# Altium PCB PhonePresent-oldversion.PcbDoc
Units mm, origin at the board's own origin, x right, y up, seen from the top; angles counter-clockwise.
Board outline 152.4 x 101.6 mm, 2 copper layers (Top Layer, Bottom Layer); 9 components, 6 nets, 19 pads, 1 vias.
Unrouted connection lines stored in the file: 1.
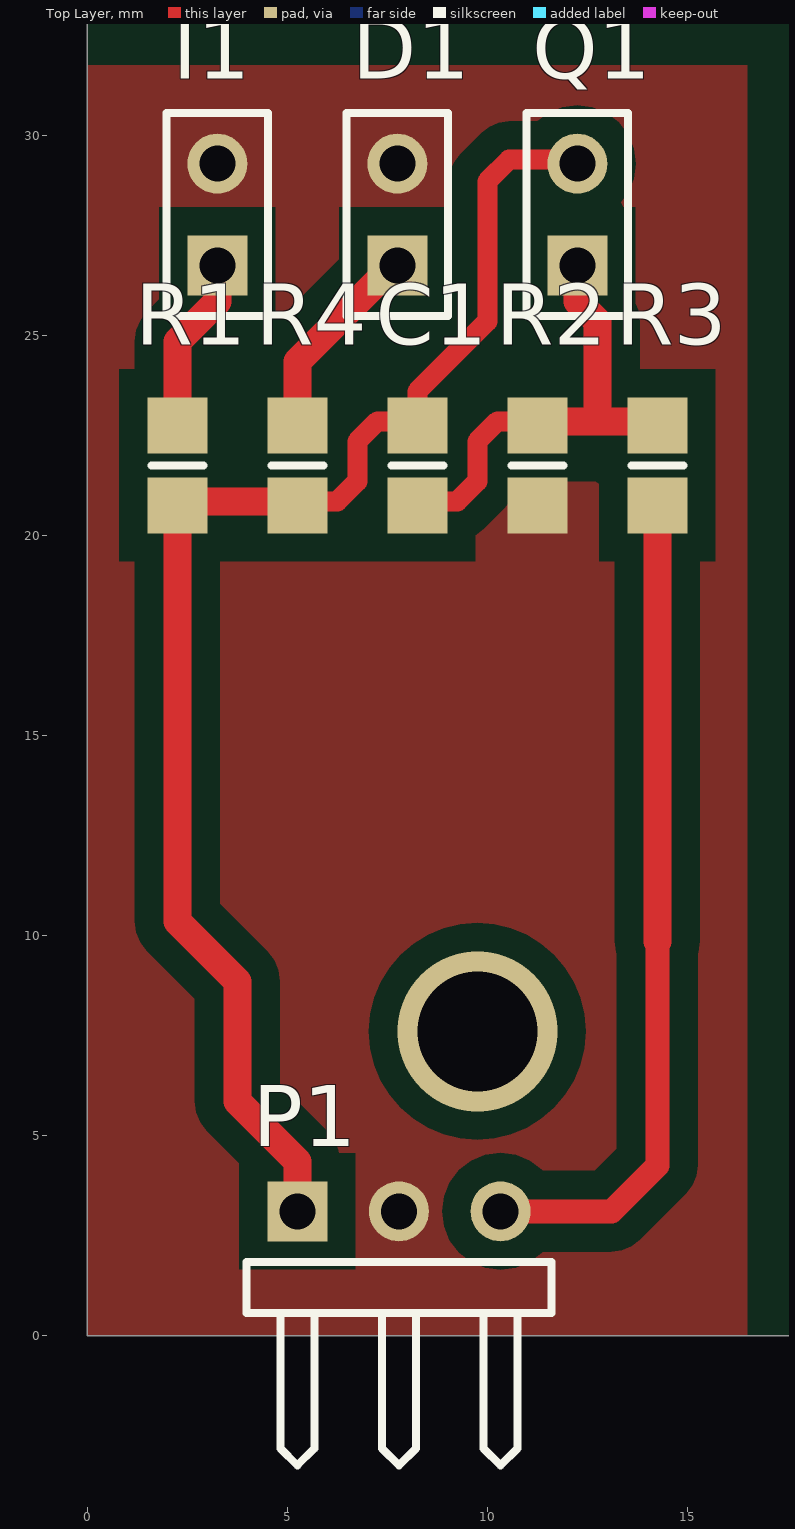
[diagram p0: Top Layer view]
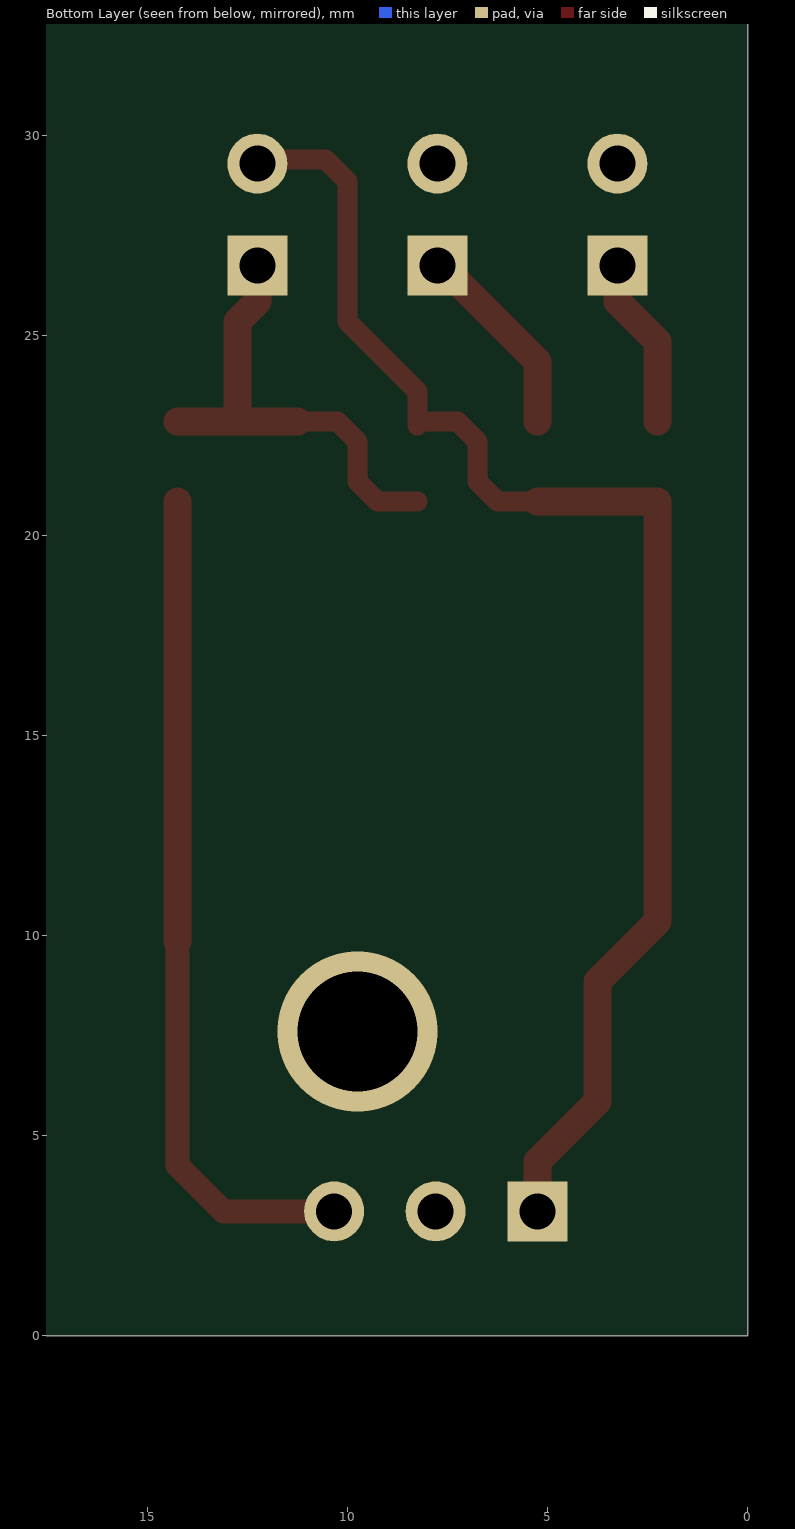
[diagram p1: Bottom Layer view, seen from below]

## Layer stack, top to bottom
Top Solder: solder mask 0.0102, Solder Resist, Dk 3.5
Top Layer: signal copper 0.0356
Dielectric 1: dielectric 0.32, FR-4, Dk 4.8
Bottom Layer: signal copper 0.0356
Bottom Solder: solder mask 0.0102, Solder Resist, Dk 3.5

## Board outline
-0.007,-0.011 152.393,-0.011 152.393,101.589 -0.007,101.589

## Design rules (kind name [scope] priority, off if disabled: settings)
Clearance [All] p1: gap=0.7 ignorepadtopadclearanceinfootprint=FALSE
PlaneConnect [All] p1: planeconnectstyle=Direct reliefexpansion=0.508 reliefentries=4 reliefconductorwidth=0.254 reliefairgap=0.254
PolygonConnect [All] p1: connectstyle=Direct reliefconductorwidth=0.254 reliefentries=4 polygonreliefangle="90 Angle" airgapwidth=0.254
RoutingVias [All] p1: holewidth=0.711 width=1.27 viastyle="Through Hole" minholewidth=0.711 minwidth=1.27 maxholewidth=0.711 maxwidth=1.27
SolderMaskExpansion [All] p1: expansion=0.102
Width [All] p1: maxlimit=0.254 minlimit=0.254 preferedwidth=0.254
29 further rules are at their usual default settings.

## Components (designator, comment, footprint, x,y, rotation, side; value= is the part's Value field where it differs from the comment)
C1 "Cap" 6-0805_M 8.25,21.75 r90 top value=100nf
D1 "LED1" hdr1x2 7.75,26.75 r90 top
I1 "ir1" HDR1X2 3.25,26.75 r90 top
P1 "Header 3H" HDR1X3H 5.25,3.1 r0 top
Q1 "Photo NPN" HDR1X2 12.25,26.75 r90 top
R1 "220" 6-0805_M 2.25,21.75 r90 top
R2 "10K" 6-0805_M 11.25,21.75 r90 top value=10k
R3 "1K" 6-0805_M 14.25,21.75 r270 top value=1k
R4 "220" 6-0805_M 5.25,21.75 r90 top

## Footprints (in the part's own frame and the unit in brackets; to place one, negate y for a bottom-side part, rotate by r counter-clockwise, add the part's x,y. Pads: shape width x height; smd on the part's side, far side on the other; paste and mask are expansions set on the pad)
6-0805_M [mm] "Chip Resistor, Body 2.0x1.2mm, IPC Low Density"
  rect 1.4x1.5 smd: 1(-1,0) 2(1,0)
  silkscreen extent 0,-0.65 0,0.65, body extent -1.07,-0.7 1.07,0.7, height 0.7
hdr1x2 [mm] "Connector; Header; 2 Position"
  rect 1.5x1.5 hole 0.9: 1(0,0)
  round 1.5 hole 0.9: 2(2.54,0)
  silkscreen extent -1.27,-1.27 3.81,1.27
HDR1X2 [mm] "Connector; Header; 2 Position"
  rect 1.5x1.5 hole 0.9: 1(0,0)
  round 1.5 hole 0.9: 2(2.54,0)
  silkscreen extent -1.27,-1.27 3.81,1.27
HDR1X3H [mm] "Connector; Header; 3 Position; Right Angle"
  rect 1.5x1.5 hole 0.9: 1(0,0)
  round 1.5 hole 0.9: 2(2.54,0) 3(5.08,0)
  silkscreen extent -1.27,-6.35 6.35,-1.27

## Part data
C1: "Capacitor", LatestRevisionDate=17-Jul-2002, LatestRevisionNote="Re-released for DXP Platform.", PackageDescription="Radial Cap, Thru-Hole; 2 Leads; 0.3 in Pin Spacing", PackageReference=RAD-0.3, Published=8-Jun-2000, Publisher="Altium Limited"
D1: "Typical RED GaAs LED", LatestRevisionDate=08-Jul-2005, LatestRevisionNote="Mech Layer 1 removed.", PackageDescription="LED; 2 Leads", PackageReference=LED-1, Published=8-Jun-2000, Publisher="Altium Limited"
I1: library part LED0, "Typical INFRARED GaAs LED", LatestRevisionDate=08-Jul-2005, LatestRevisionNote="Mech Layer 1 removed.", PackageDescription="LED; 2 Leads", PackageReference=LED-0, Published=8-Jun-2000, Publisher="Altium Limited"
P1: "Header, 3-Pin, Right Angle", LatestRevisionDate=17-Jul-2002, LatestRevisionNote="Re-released for DXP Platform.", Publisher="Altium Limited"
Q1: library part "Header 2", "Header, 2-Pin", LatestRevisionDate=17-Jul-2002, LatestRevisionNote="Re-released for DXP Platform.", Publisher="Altium Limited"
R1 R2 R3 R4: library part Res1, "Resistor", LatestRevisionDate=17-Jul-2002, LatestRevisionNote="Re-released for DXP Platform.", PackageDescription="Axial Device, Thru-Hole; 2 Leads; 0.3 in Pin Spacing", PackageReference=AXIAL-0.3, Published=8-Jun-2000, Publisher="Altium Limited"

## Via types
v1: diameter 4, hole 3, Top Layer to Bottom Layer, 1 vias

## Nets (pads, with @x,y where several pads share a name; then routed paths per layer and width w, separated by ;. In a path a pad name is that pad's centre, name@x,y a point inside that pad or via, vN(x,y) a via of type N, cw(c..) or ccw(c..) an arc to the next point about the centre after c; other vN are vias at no path point)
GND: D1.2 I1.2 P1.2 R2.1
NetC1_1: C1.1 Q1.1 R2.2 R3.1 | length 11.6
  Top Layer w0.5: C1.1@8.25,20.85 9.25,20.85 9.75,21.35 9.75,22.35 10.25,22.85 R2.2@11.25,22.85
  Top Layer w0.7: R2.2@11.25,22.85 R3.1@14.25,22.85 ; Q1.1@12.25,26.85 12.25,25.85 12.75,25.35 12.75,22.85
NetD1_1: D1.1 R4.2 | length 5
  Top Layer w0.7: R4.2@5.25,22.85 5.25,24.35 D1.1@7.75,26.85
NetI1_1: I1.1 R1.2 | length 4.4
  Top Layer w0.7: R1.2@2.25,22.85 2.25,24.85 3.25,25.85 I1.1@3.25,26.85
OUT: P1.3 R3.2 | length 11
  Top Layer w0.7: 14.25,9.85 R3.2@14.25,20.85
VCC: C1.2 P1.1 Q1.2 R1.1 R4.1 | length 35.6
  Top Layer w0.5: R4.1@5.25,20.85 6.25,20.85 6.75,21.35 6.75,22.35 7.25,22.85 C1.2@8.25,22.85 ; C1.2 C1.2@8.25,22.85 ; Q1.2@12.25,29.39 10.54,29.39 10,28.85 10,25.35 8.25,23.6 C1.2@8.25,22.85
  Top Layer w0.7: R1.1 2.25,10.35 3.75,8.85 3.75,5.85 5.25,4.35 P1.1 ; R1.1@2.25,20.85 R4.1@5.25,20.85
copper on no net: | length 10
  Top Layer w0.6: 10.33,3.1 13.1,3.1 14.25,4.25 14.25,9.85
  other v1: 9.75,7.6

## Polygon pours and split planes (outlines as drawn)
GND on Top Layer "Top Layer-GND" (solid, remove dead copper, pour order 2): 0,0 16.5,0 16.5,31.75 0,31.75